# EAGLE board holo (EAGLE 6.1), part 1 of 2
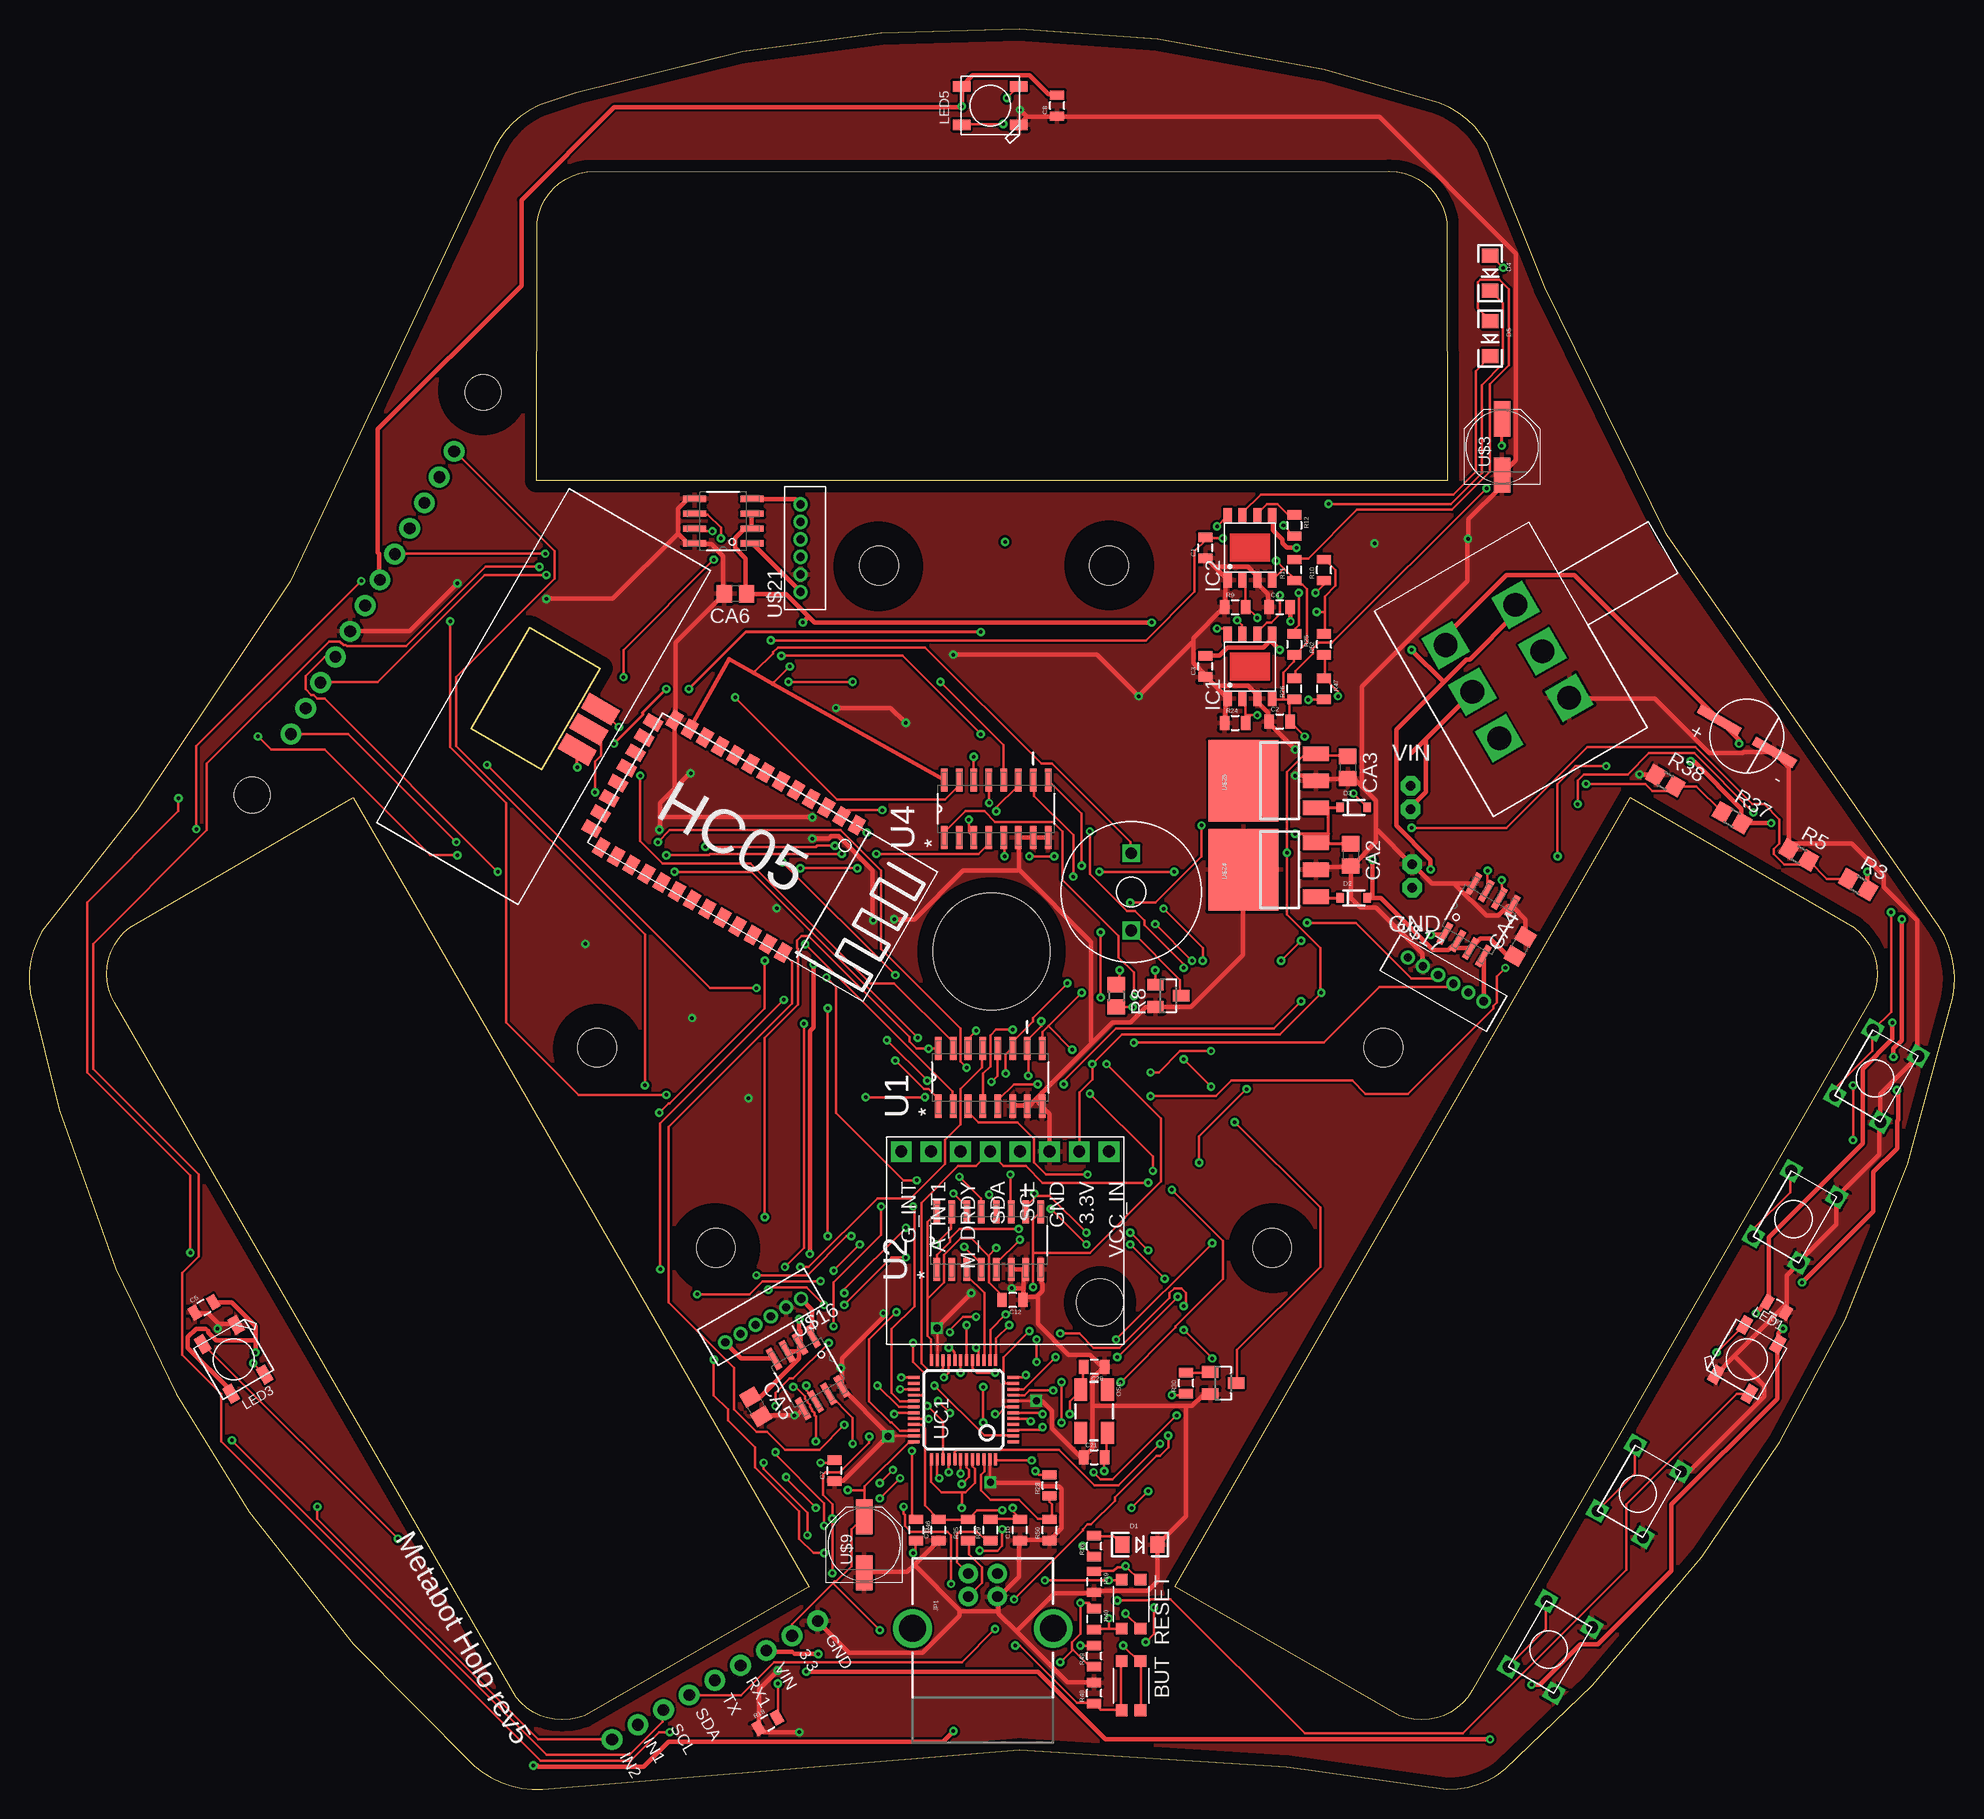
[diagram p0: board, top side]
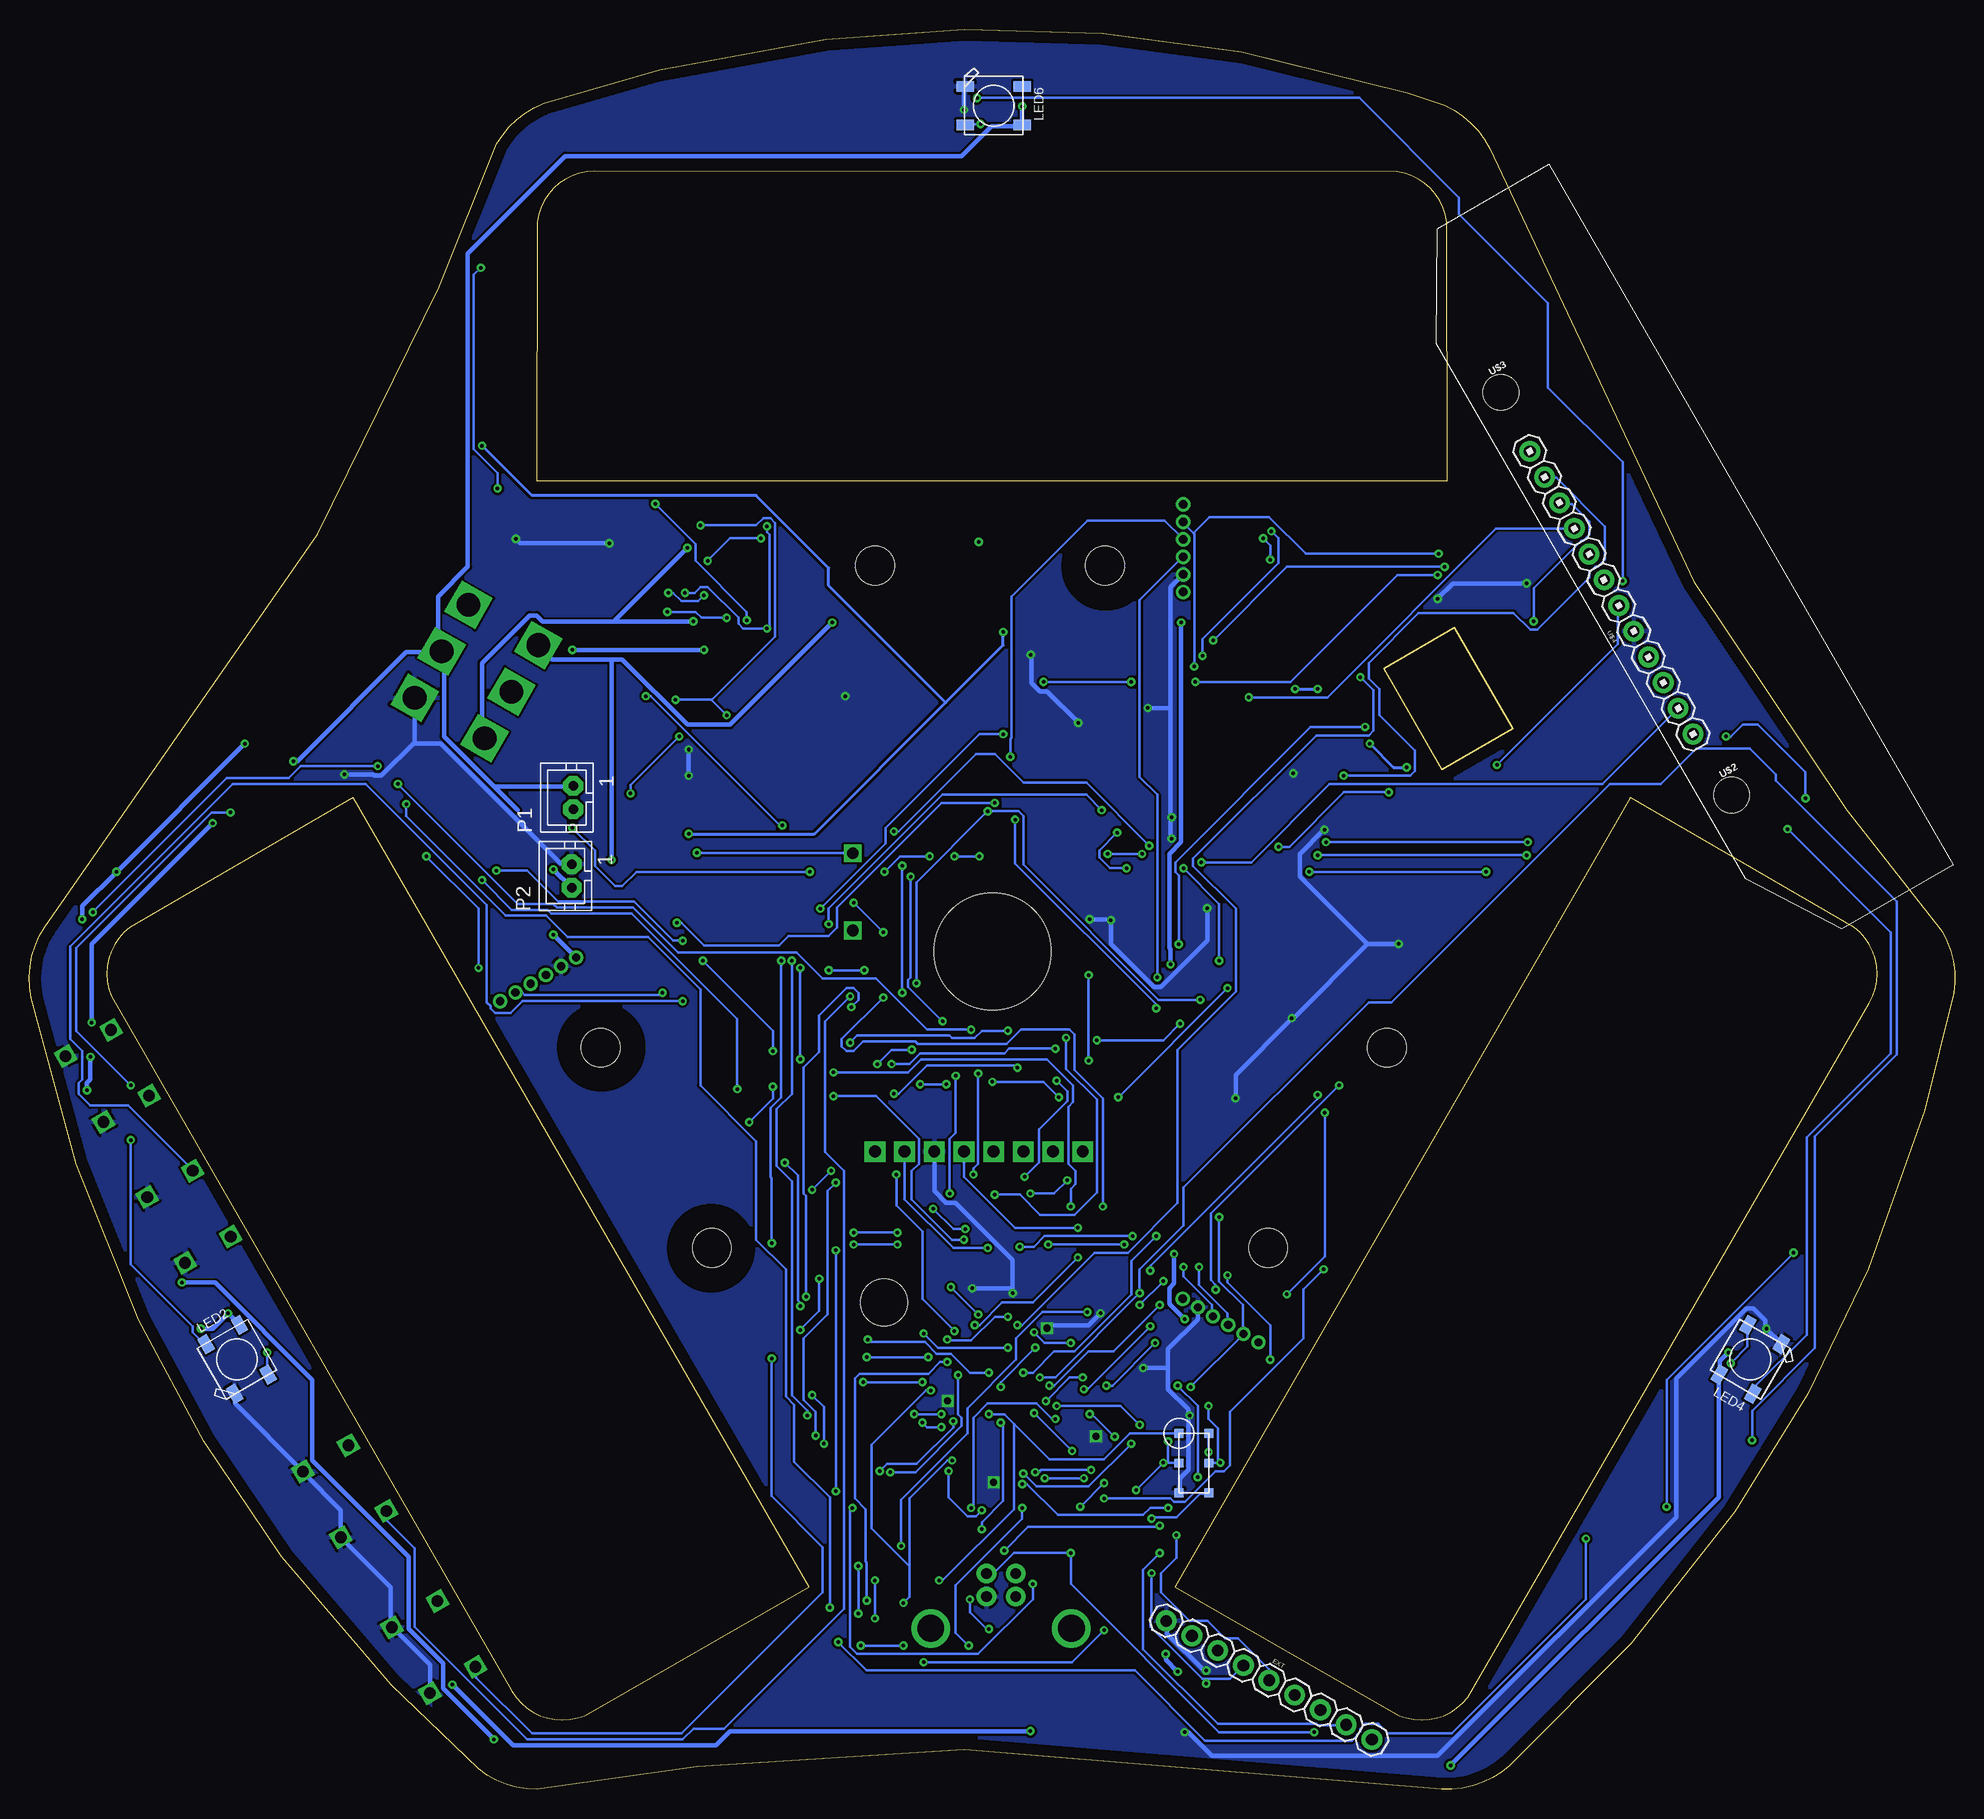
[diagram p1: board, bottom side, seen from below]

Size 164.83 x 150.69 mm. Coordinates in mm from the lower left corner, seen from the top.
Outline: 122.25,0.05 123.14,0.2 124.01,0.45 124.85,0.79 125.64,1.23 126.38,1.75 133.82,8.9 143.2,19.91 149.86,29.75 155.47,40.2 160.82,53.54 164.66,67.76 164.8,68.65 164.83,69.56 164.76,70.46 164.59,71.35 164.32,72.22 163.96,73.04 163.5,73.82 140.14,107.48 129.74,128.59 124.81,140.86 124.32,141.63 123.74,142.32 123.09,142.95 122.37,143.51 121.6,143.97 120.78,144.35 110.87,147.22 96.64,149.84 84.78,150.69 72.93,150.32 61.07,148.75 46.85,145.26 43.63,144.17 42.83,143.75 42.08,143.24 41.4,142.64 40.78,141.98 40.25,141.25 39.8,140.46 22.33,103.41 9.25,83.85 1.09,73.44 0.67,72.63 0.36,71.78 0.14,70.9 0.02,70.01 0,69.1 0.08,68.2 2.55,58.18 7.4,44.55 12.59,33.86 18.84,23.78 27.71,12.48 38.1,2.05 38.81,1.48 39.58,1 40.39,0.61 41.25,0.31 42.14,0.11 43.03,0.01 43.94,0.02 84.76,3.42 107.65,1.93 121.34,0 122.25,0.05
Outline: 121.02,135.44 121.23,134.83 121.23,134.83 121.36,134.18 121.4,112.04 43.42,112.04 43.47,134.19 43.59,134.83 43.59,134.83 43.8,135.44 44.09,136.03 44.45,136.57 44.88,137.06 45.38,137.49 45.92,137.86 46.5,138.14 47.12,138.35 47.12,138.35 47.76,138.48 116.41,138.52 117.06,138.48 117.7,138.35 117.7,138.35 118.32,138.14 118.91,137.86 119.45,137.49 119.94,137.06 120.37,136.57 120.73,136.03 121.02,135.44
Outline: 7.02,67.92 6.81,68.54 6.81,68.54 6.69,69.18 6.64,69.83 6.69,70.48 6.81,71.12 6.81,71.12 7.02,71.74 7.31,72.32 7.67,72.87 8.1,73.36 8.6,73.79 27.75,84.9 66.74,17.36 47.54,6.33 46.92,6.12 46.92,6.12 46.28,5.99 45.63,5.95 44.98,5.99 44.34,6.12 44.34,6.12 43.72,6.33 43.14,6.62 42.6,6.98 42.1,7.41 41.67,7.9 7.31,67.34 7.02,67.92
Outline: 157.8,71.74 158.01,71.12 158.01,71.12 158.14,70.48 158.18,69.83 158.14,69.18 158.01,68.54 158.01,68.54 157.8,67.92 123.51,8.44 123.15,7.9 122.72,7.41 122.23,6.98 121.69,6.62 121.1,6.33 120.48,6.12 120.48,6.12 119.84,5.99 119.19,5.95 118.54,5.99 117.9,6.12 117.9,6.12 117.28,6.33 98.09,17.36 137.08,84.9 156.23,73.79 156.72,73.36 157.15,72.87 157.51,72.32 157.8,71.74
Copper layers (1*16): Top 0.035mm / dielectric 1.5mm / Bottom 0.035mm
Design rules: minimum track width 6mil, minimum drill 0.3mm, track to track 0.205mm, track to pad 0.205mm, pad to pad 0.205mm, via to via 0.205mm, smd to smd 8mil, copper to edge 40mil, drill to drill 8mil, minimum pad ring 10mil, minimum via ring 8mil, stop-mask expansion 4mil, vias tented up to drill 25mil, thermal gap 10mil
Net classes: 0 default: width 0.203 mm; 1 alime: width 0.254 mm; 2 bigalime: width 0.381 mm
Holes 10 mm at 82.37,71.75
tRestrict: area 44.8,59.6 to 52.5,67.2; area 54.9,42.5 to 62.5,50.2; area 112.2,59.7 to 119.8,67.4; area 102.6,42.5 to 110.3,50.2; area 68.9,100.9 to 76.5,108.5; area 88.6,101 to 96.3,108.6; area 77.5,66.9 to 87.2,76.6; area 35,115.9 to 42.7,123.6; area 15.3,81.4 to 23,89.1
bRestrict: area 44.9,59.6 to 52.4,67.2; area 54.9,42.7 to 62.5,50.2; area 112.1,59.8 to 119.6,67.3; area 102.7,42.6 to 110.2,50.1; area 68.9,100.9 to 76.4,108.5; area 88.6,101 to 96.2,108.6; area 77.5,66.9 to 87.3,76.6; area 15.3,81.4 to 22.9,88.9; area 35,115.9 to 42.5,123.5

## Footprints (pad centres in the part's own frame; a part is rotated, then mirrored left to right if it is on the bottom)
PUSHBUTTON-KMR241GLFS = smd 1 x 1: P$1 2.1,0.8; P$2 2.1,-0.8; P$3 -2.1,0.8; P$4 -2.1,-0.8
0805 = smd 0.8 x 1.2: 1 -0.9,0; 2 0.9,0
C0805 = smd 1.3 x 1.5: 1 -0.95,0; 2 0.95,0
LED-1206 = smd 1.2 x 1.4: A -1.5,0; C 1.5,0
SOD-323 = smd 0.63 x 0.83: 1 -1.15,0; 2 1.15,0
CONNEC_1X09 = drill 1 pad 1.778: 1 -1.27,1.27; 2 1.27,1.27; 3 3.81,1.27; 4 6.35,1.27; 5 8.89,1.27; 6 11.43,1.27; 7 13.97,1.27; 8 16.51,1.27; 9 19.05,1.27
SO8 = smd 1.981 x 0.533: 1 -2.464,1.905; 2 -2.464,0.635; 3 -2.464,-0.635; 4 -2.464,-1.905; 5 2.464,-1.905; 6 2.464,-0.635; 7 2.464,0.635; 8 2.464,1.905
SOP-8 = smd 1.3 x 0.7: 1 -2.75,1.905; 2 -2.75,0.635; 3 -2.75,-0.635; 4 -2.75,-1.905; 5 2.75,-1.905; 6 2.75,-0.635; 7 2.75,0.635; 8 2.75,1.905
USB-B-PTH = drill 0.914 pad 1.676: D+ 0,1.25; D- 1.981,1.25; GND 0,-1.25; VBUS 1.981,-1.25 | drill 2.286: S1 -2.718,-6.02; S2 -2.718,6.02
WS2812B = smd 1.5 x 0.9: 1-VDD 2.45,-1.65; 2-DOUT 2.45,1.65; 3-GND -2.45,1.65; 4-DIN -2.45,-1.65
CRYSTAL-SMD-5X3 = smd 1.9 x 1.1: 1 -1.85,-1.15; 2 1.85,-1.15; 3 1.85,1.15; 4 -1.85,1.15
JST-PH2 = drill 0.813 pad 1.676 octagon: 1 1,0; 2 -1,0
6PADS = smd 0.762 x 0.762: 1 0,0; 2 0,2.54; 3 0,5.08; 4 2.54,5.08; 5 2.54,2.54; 6 2.54,0
R0805 = smd 1.3 x 1.5: 1 -0.95,0; 2 0.95,0
SOIC127P600X175-16N = smd 1.981 x 0.559: 1 -2.464,4.445; 2 -2.464,3.175; 3 -2.464,1.905; 4 -2.464,0.635; 5 -2.464,-0.635; 6 -2.464,-1.905; 7 -2.464,-3.175; 8 -2.464,-4.445; 9 2.464,-4.445; 10 2.464,-3.175; 11 2.464,-1.905; 12 2.464,-0.635; 13 2.464,0.635; 14 2.464,1.905; 15 2.464,3.175; 16 2.464,4.445
GY-85 = drill 1.016 pad 1.778 square: 3.3 0,15.24; A_INT1 0,2.54; G_INT 0,0; GND 0,12.7; M_DRDY 0,5.08; SCL 0,10.16; SDA 0,7.62; VCC_IN 0,17.78 | hole 4: 12.9,17
430186070716 = drill 1 square: 1 0,4.5; 2 0,0; 3 6.5,4.5; 4 6.5,0
PANASONIC_D = smd 3 x 1.4: + 2.4,0; - -2.4,0
HC-05 = smd 1.5 x 1: 3.3 0,-16.5; GND 0,-18; KEY 12.6,0; P$3 0,-3; P$4 0,-4.5; P$5 0,-6; P$6 0,-7.5; P$7 0,-9; P$8 0,-10.5; P$9 0,-12; P$10 0,-13.5; P$11 0,-15; P$23 12.6,-1.5; P$24 12.6,-3; P$25 12.6,-4.5; P$26 12.6,-6; P$27 12.6,-7.5; P$28 12.6,-9; P$29 12.6,-10.5; P$30 12.6,-12; P$31 12.6,-13.5; P$32 12.6,-15; P$33 12.6,-16.5; P$34 12.6,-18; RX 0,-1.5; TX 0,0 | smd 1 x 1.5: P$14 1.1,-19.5; P$15 2.6,-19.5; P$16 4.1,-19.5; P$17 5.6,-19.5; P$18 7.1,-19.5; P$19 8.6,-19.5; P$20 10.1,-19.5; P$21 11.6,-19.5
GP2_THROUGH = smd 1.5 x 3 bottom: GND 5,8.762; VCC 3,8.762; VO 7,8.762
HOLO_OPTICALS = drill 1 pad 1.778: 3.3V -4.699,42.367; EN1 -4.699,52.527; EN2 -4.699,24.587; GND -4.699,34.747; O1 -4.699,49.987; O2 -4.699,47.447; O3 -4.699,44.907; O4 -4.699,37.287; O5 -4.699,32.207; O6 -4.699,29.667; O7 -4.699,27.127; VIN -4.699,39.827 | hole 3.048: -4.445,18.418; -4.318,58.142
PANASONIC_D8 = smd 4.016 x 0.8: + 2.73,0; - -2.73,0
SOT-23 = smd 1 x 1.4: 1 -0.95,-1.1; 2 0.95,-1.1; 3 0,1.1
BUZZER66 = drill 1 square: P$1 -3.3,0; P$2 3.3,0
L202021MA04Q = drill 2.032 square: P1 6.909,-4.597; P2 6.909,0; P3 6.909,4.597; P4 0,-4.597; P5 0,0; P6 0,4.597
B6B-ZR = drill 0.7: 1 9,-1.3; 2 7.5,-1.3; 3 6,-1.3; 4 4.5,-1.3; 5 3,-1.3; 6 1.5,-1.3
SOT223 = smd 1.219 x 2.235: 1 -2.311,-3.099; 2 0,-3.099; 3 2.311,-3.099 | smd 7 x 6: 4 0,3.099
STAND-OFF = hole 3.302: 0,0
LQFP48 = smd 0.254 x 1: 1 -2.75,-4.25; 2 -2.25,-4.25; 3 -1.75,-4.25; 4 -1.25,-4.25; 5 -0.75,-4.25; 6 -0.25,-4.25; 7 0.25,-4.25; 8 0.75,-4.25; 9 1.25,-4.25; 10 1.75,-4.25; 11 2.25,-4.25; 12 2.75,-4.25; 25 2.75,4.25; 26 2.25,4.25; 27 1.75,4.25; 28 1.25,4.25; 29 0.75,4.25; 30 0.25,4.25; 31 -0.25,4.25; 32 -0.75,4.25; 33 -1.25,4.25; 34 -1.75,4.25; 35 -2.25,4.25; 36 -2.75,4.25 | smd 1 x 0.254: 13 4.25,-2.75; 14 4.25,-2.25; 15 4.25,-1.75; 16 4.25,-1.25; 17 4.25,-0.75; 18 4.25,-0.25; 19 4.25,0.25; 20 4.25,0.75; 21 4.25,1.25; 22 4.25,1.75; 23 4.25,2.25; 24 4.25,2.75; 37 -4.25,2.75; 38 -4.25,2.25; 39 -4.25,1.75; 40 -4.25,1.25; 41 -4.25,0.75; 42 -4.25,0.25; 43 -4.25,-0.25; 44 -4.25,-0.75; 45 -4.25,-1.25; 46 -4.25,-1.75; 47 -4.25,-2.25; 48 -4.25,-2.75

## Placement (x,y rotation side)
BUT  KMR211GLFS  [PUSHBUTTON-KMR241GLFS]  94.33,8.89 270 top
C1  10uF  [0805]  100.68,106.29 90 top
C2  10uF  [0805]  107.03,91.44 0 top
C3  10uF  [0805]  100.68,96.13 90 top
C4  10uF  [0805]  107.03,101.21 0 top
C5  1uF  [0805]  14.96,41.27 30 top
C6  1uF  [0805]  149.58,41.27 150 top
C7  1uF  [0805]  68.93,27.3 90 top
C8  1uF  [0805]  87.98,144.14 90 top
C10  47pF  [0805]  84.81,22.22 90 top
C11  47pF  [0805]  77.82,22.22 90 top
C12  1uF  [0805]  84.17,41.91 180 top
C20  18pF  [0805]  91.16,36.19 180 top
C21  18pF  [0805]  91.16,28.44 0 top
CA2  C_EU-100NF  [C0805]  113.13,80.01 270 top
CA3  C_EU-100NF  [C0805]  112.88,87.5 270 top
CA4  C_EU-100NF  [C0805]  127.62,72.16 60 top
CA5  C_EU-100NF  [C0805]  62.2,32.76 300 top
CA6  C_EU-100NF  [C0805]  60.45,102.37 180 top
D1  Blue  [LED-1206]  95.1,20.95 0 top
D2  [SOD-323]  113.38,76.32 0 top
D3  [SOD-323]  113.38,84.07 0 top
D4  Blue  [LED-1206]  125.07,129.79 270 top
D5  Blue  [LED-1206]  125.07,124.2 270 top
EXT  CONNEC_1X09  [CONNEC_1X09]  67.03,12.7 330 bottom
HB1  L9110  [SO8]  66.65,35.68 300 top
HB2  L9110  [SO8]  124.07,74.45 60 top
HB3  L9110  [SO8]  59.41,108.58 180 top
IC1  TP4056  [SOP-8]  104.49,96.13 90 top
IC2  TP4056  [SOP-8]  104.49,106.29 90 top
JP1  USB-B  [USB-B-PTH]  81.63,16.51 90 top
LED1  WS2812B5050  [WS2812B]  147.04,36.83 60 top
LED2  WS2812B5050  [WS2812B]  147.04,36.83 120 bottom
LED3  WS2812B5050  [WS2812B]  17.5,36.83 300 top
LED4  WS2812B5050  [WS2812B]  17.5,36.83 240 bottom
LED5  WS2812B5050  [WS2812B]  82.27,144.14 180 top
LED6  WS2812B5050  [WS2812B]  82.27,144.14 0 bottom
OSC  8MHz  [CRYSTAL-SMD-5X3]  91.16,32.38 270 top
P1  [JST-PH2]  118.27,84.91 90 bottom
P2  [JST-PH2]  118.4,78.2 90 bottom
PROGRAM  CONNEC_1X066PADS  [6PADS]  66.39,25.4 0 bottom
R3  20K  [R0805]  156.56,77.47 330 top
R5  10K  [R0805]  151.48,80.01 330 top
R8  2K  [R0805]  93.06,67.94 270 top
R9  5K  [0805]  103.22,101.21 0 top
R10  5K  [0805]  110.84,104.39 90 top
R11  1K  [0805]  108.3,104.39 90 top
R12  5K  [0805]  108.3,108.2 270 top
R18  10K  [0805]  63.22,5.71 29.5 top
R24  5K  [0805]  103.22,91.31 0 top
R25  2K  [0805]  108.3,98.04 270 top
R26  1K  [0805]  108.3,94.23 90 top
R28  1.5K  [0805]  87.35,26.03 90 top
R29  22  [0805]  82.27,22.22 90 top
R30  1K  [0805]  99.03,34.79 90 top
R35  22  [0805]  80.36,22.22 90 top
R36  1K  [0805]  91.16,20.82 90 top
R37  10K  [R0805]  145.77,83.18 330 top
R38  10K  [R0805]  140.05,86.36 330 top
R39  1K  [0805]  91.16,17.78 270 top
R40  10K  [0805]  91.16,14.6 270 top
R46  1K  [0805]  75.92,22.22 270 top
R47  4K  [0805]  110.84,94.23 270 top
R48  10K  [0805]  91.16,8.25 90 top
R49  1K  [0805]  91.16,11.43 90 top
R50  10K  [0805]  87.35,22.22 90 top
R52  4K  [0805]  110.84,98.04 90 top
RESET  KMR211GLFS  [PUSHBUTTON-KMR241GLFS]  94.33,15.87 270 top
U1  CD4051BM  [SOIC127P600X175-16N]  82.27,60.96 90 top
U2  CD4051BM  [SOIC127P600X175-16N]  82.14,46.99 90 top
U4  CD4051BM  [SOIC127P600X175-16N]  82.78,83.94 90 top
U$1  GY-85  [GY-85]  74.65,54.61 270 top
U$2  [430186070716]  130.53,8.25 60 top
U$3  47uF  [PANASONIC_D]  126.08,114.93 90 top
U$4  HC05  [HC-05]  70.84,82.55 240 top
U$5  GP2  [GP2_THROUGH]  37.82,90.8 120 bottom
U$6  [430186070716]  138.15,21.59 60 top
U$7  [430186070716]  151.48,45.08 60 top
U$8  HOLO_OPTICALS  [HOLO_OPTICALS]  6.04,71.41 30 bottom
U$9  47uF  [PANASONIC_D]  71.47,20.95 90 top
U$10  [430186070716]  158.47,57.15 60 top
U$11  220uF  [PANASONIC_D8]  147.04,90.17 150 top
U$12  NPN_BC817,215  [SOT-23]  97.51,67.94 270 top
U$13  BUZZER66  [BUZZER66]  94.33,76.83 90 top
U$14  DPDT  [L202021MA04Q]  123.54,93.98 30 top
U$16  B6B-ZR  [B6B-ZR]  68.03,41.64 210 top
U$17  B6B-ZR  [B6B-ZR]  117.36,73.1 330 top
U$18  NPN_BC817,215  [SOT-23]  102.21,34.79 270 top
U$21  B6B-ZR  [B6B-ZR]  64.74,101.02 90 top
U$24  LM2940IMP-5.0  [SOT223]  107.03,78.74 90 top
U$25  TS2940CW-3.3RP  [SOT223]  107.03,86.36 90 top
U$31  [STAND-OFF]  48.61,63.5 45 top
U$33  [STAND-OFF]  58.77,46.35 45 top
U$35  [STAND-OFF]  115.92,63.5 45 top
U$36  [STAND-OFF]  106.4,46.35 45 top
U$38  [STAND-OFF]  72.74,104.77 45 top
U$39  [STAND-OFF]  92.43,104.77 45 top
UC1  STM32F103CBT6  [LQFP48]  79.98,32.51 90 top

## Library data of the parts
BUT RESET = okie; FARNELL: 1437637
C1-C8 C10-C12 R9-R12 R24-R26 R30 R47 R52 = SparkFun-Passives
C20 C21 = SparkFun-Passives; FARNELL: 1414620
CA2-CA6 = rhoban; DATASHEET: condo100nF.pdf; FARNELL_LINK: http://fr.farnell.com/kemet/c0805c104j5ractu/condensateur-100nf-50v-x7r-0805/dp/1414663RL
D1 = SparkFun; FARNELL: 1581233
D2 D3 = SparkFun-DiscreteSemi; FARNELL: 8737843RL
D4 D5 = SparkFun; FARNELL: 1581229RL
EXT PROGRAM U$5 = rhoban; FARNELL: -
HB1-HB3 = rhoban; FARNELL: L9110 SOIC8
IC1 IC2 = TP4056; FARNELL: TP4056 SOIC8
JP1 = SparkFun-Connectors; FARNELL: 1308876; PROD_ID: CONN-08278
LED1-LED6 = adafruit; FARNELL: WS2812B 5050
OSC = SparkFun2; FARNELL: 2467818
P1 P2 = jst-ph; FARNELL: JST-PH 2P
R3 R8 = rcl
R5 R37 R38 = rcl; FARNELL: 2447553
R18 R40 R48 R50 = SparkFun-Passives; FARNELL: 2447553
R28 = SparkFun-Passives; FARNELL: 2446909
R29 R35 = SparkFun-Passives; FARNELL: 2446926
R36 R39 R46 R49 = SparkFun-Passives; FARNELL: 2446904
U1 U2 U4 = rhoban; FARNELL: 2334931; MPN: CD4051BM; OC_FARNELL: 8388970; OC_NEWARK: 05B5595; PACKAGE: SOIC-16; SUPPLIER: Texas Instruments
U$1 = rhoban; FARNELL: 1593463
U$2 U$6 U$7 U$10 = rhoban; FARNELL: 2402407
U$3 U$9 = rhoban; FARNELL: 9696946
U$4 = rhoban; FARNELL: MODULE HC-05
U$8 = rhoban; FARNELL: 1593465
U$11 = rhoban; FARNELL: 1850103
U$12 U$18 = rhoban; FARNELL: 1081223
U$13 = rhoban; FARNELL: CEM-1203
U$14 = rhoban; FARNELL: 2435159
U$16 U$17 U$21 = jst; FARNELL: JST-XH 6P
U$24 = rhoban; FARNELL: 1469076
U$25 = rhoban; FARNELL: 7261403
U$31 U$33 U$35 U$36 U$38 U$39 = SparkFun-Electromechanical
UC1 = stm32; FARNELL: 1606327

## Nets
3.3: C7.2 C12.2 CA3.1 EXT.2 PROGRAM.2 R40.1 R49.1 U1.16 U2.16 U4.16 U$1.3.3 U$4.3.3 U$8.3.3V U$9.+ U$13.P$2 U$16.2 U$17.2 U$21.2 U$25.3 UC1.9 UC1.24 UC1.36 UC1.48
A_INT: U$1.A_INT1
ADDR1: U1.11 U2.11 U4.11 UC1.38
ADDR2: U1.10 U2.10 U4.10 UC1.40
ADDR3: U1.9 U2.9 U4.9 UC1.14
BAT1+ [bigalime]: C3.2 IC1.5 P2.2 U$14.P3
BAT2+ [bigalime]: P1.2 U$14.P5
BAT2- [bigalime]: C5.2 C6.2 C8.2 LED1.1-VDD LED2.1-VDD LED3.1-VDD LED4.1-VDD LED5.1-VDD LED6.1-VDD P1.1 R37.2 U$8.VIN U$14.P2
BAT2CHARGE [bigalime]: C4.2 IC2.5 U$14.P4
BOOT1: PROGRAM.4 UC1.20
BTN1: U2.1 U$2.1 U$2.3
BTN2: U4.1 U$6.1 U$6.3
BTN3: U1.5 U$7.1 U$7.3
BTN4: U2.5 U$10.1 U$10.3
BUTTON: BUT.P$2 BUT.P$4 R48.1 UC1.37 UC1.44
BUZZER: R8.2 UC1.10
CHARGE_EN: IC1.8 IC2.8 R25.1
DISC: R28.1 R50.2 UC1.46
G_DRDY: U$1.M_DRDY
G_INT: U$1.G_INT
GND [bigalime]: C1.1 C2.1 C3.1 C4.1 C5.1 C6.1 C7.1 C8.1 C10.1 C11.1 C12.1 C20.1 C21.1 CA2.2 CA3.2 CA4.2 CA5.2 CA6.2 D1.C EXT.1 HB1.5 HB1.8 HB2.5 HB2.8 HB3.5 HB3.8 IC1.1 IC1.3 IC2.1 IC2.3 JP1.GND LED1.3-GND LED2.3-GND LED3.3-GND LED4.3-GND LED5.3-GND LED6.3-GND P2.1 PROGRAM.1 R5.1 R9.1 R18.1 R24.1 R38.1 R39.2 R48.2 R50.1 U1.6 U1.7 U1.8 U2.6 U2.7 U2.8 U4.6 U4.7 U4.8 U$1.GND U$2.2 U$2.4 U$3.- U$4.GND U$6.2 U$6.4 U$7.2 U$7.4 U$8.GND U$9.- U$10.2 U$10.4 U$11.- U$12.2 U$14.P1 U$16.5 U$17.5 U$18.2 U$21.5 U$24.2 U$24.4 U$25.2 UC1.8 UC1.23 UC1.35 UC1.47
HAS_USB: R46.1 UC1.25
IMU_NC: U$1.VCC_IN
IMU_SCL: EXT.7 U$1.SCL UC1.21
IMU_SDA: EXT.6 U$1.SDA UC1.22
IN1: EXT.8 U2.4
IN2: EXT.9 U4.4
KEY: UC1.45
LED: R36.1 UC1.34
LEDS: LED1.4-DIN UC1.28
LEDS_SUITE: LED6.2-DOUT
M1A: HB1.6 UC1.43
M1B: HB1.7 UC1.42
M1C1: U1.13 U$16.4
M1C2: U2.13 U$16.3
M1P1 [bigalime]: HB1.1 U$16.6
M1P2 [bigalime]: HB1.4 U$16.1
M2A: HB2.6 UC1.16
M2B: HB2.7 UC1.29
M2C1: U4.13 U$17.4
M2C2: U1.14 U$17.3
M2P1 [bigalime]: HB2.1 U$17.6
M2P2 [bigalime]: HB2.4 U$17.1
M3A: HB3.6 UC1.18
M3B: HB3.7 UC1.17
M3C1: U2.14 U$21.4
M3C2: U4.14 U$21.3
M3P1 [bigalime]: HB3.1 U$21.6
M3P2 [bigalime]: HB3.4 U$21.1
MORE_CHARGE: R47.1 R52.1 UC1.27
MRX: U$4.TX UC1.13
MTX: U$4.RX UC1.12
MUX1: U1.3 UC1.11
MUX2: U2.3 UC1.15
MUX3: U4.3 UC1.19
N$2: D4.C IC1.7
N$3: R8.1 U$12.1
N$5: U$12.3 U$13.P$1
N$6: R39.1 RESET.P$1 RESET.P$3
N$8: IC1.6 R10.1
N$20: D4.A R26.2
N$21: D5.C IC2.7
N$22: IC2.6 R12.1
N$23: D5.A R11.2
N$26: BUT.P$1 BUT.P$3 R49.2
N$27: LED1.2-DOUT LED2.4-DIN
N$28: LED2.2-DOUT LED3.4-DIN
N$29: D1.A R36.2
N$30: LED4.2-DOUT LED5.4-DIN
N$32: LED5.2-DOUT LED6.4-DIN
N$33: R30.2 U$18.1
N$39: LED3.2-DOUT LED4.4-DIN
N$59: JP1.D- R29.1
N$60: JP1.D+ R35.1
OPTICAL1: U1.15 U$8.O1
OPTICAL2: U2.15 U$8.O2
OPTICAL3: U4.15 U$8.O3
OPTICAL4: U1.12 U$8.O4
OPTICAL5: U2.12 U$8.O5
OPTICAL6: U4.12 U$8.O6
OPTICAL7: U1.1 U$8.O7
OPTICAL_EN1: U$8.EN1 UC1.2
OPTICAL_EN2: U$8.EN2 UC1.3
OPTICAL_EN3: UC1.4
OSC_IN: C21.2 OSC.3 UC1.5
OSC_OUT: C20.2 OSC.1 UC1.6
P1: U1.2 U$5.VO
P2: U2.2
P3: U4.2
P_EN: R30.1 UC1.41
P_GND: U$5.GND U$18.3
PROG1: IC1.2 R12.2 R24.2 R47.2
PROG2: IC2.2 R9.2 R10.2 R52.2
RESET: PROGRAM.3 R40.2 RESET.P$2 RESET.P$4 UC1.7
RX1: EXT.4 PROGRAM.6 R18.2 UC1.31
TX1: EXT.5 PROGRAM.5 UC1.30
USBDM: C10.2 R29.2 UC1.32
USBDP: C11.2 R28.2 R35.2 UC1.33
VBAT: UC1.1
VCC [alime]: CA2.1 D3.1 U$3.+ U$5.VCC U$24.3 U$25.1
VIN [alime]: D2.1 U$24.1
VIN_RAW [bigalime]: CA4.1 CA5.1 CA6.1 D2.2 EXT.3 HB1.2 HB1.3 HB2.2 HB2.3 HB3.2 HB3.3 R3.2 U$11.+ U$14.P6
VOLTAGE1: R3.1 R5.2 U4.5
VOLTAGE2: R37.1 R38.2 U1.4
VUSB: C1.2 C2.2 D3.2 IC1.4 IC2.4 JP1.VBUS R11.1 R25.2 R26.1 R46.2
XBEECONF: U$4.KEY UC1.39